# Altium PCB nrf24l01_mboard.PcbDoc
Units mm, origin at the board's own origin, x right, y up, seen from the top; angles counter-clockwise.
Board outline 110 x 50 mm, 2 copper layers (TopLayer, BottomLayer); 66 components, 67 nets, 257 pads, 0 vias.
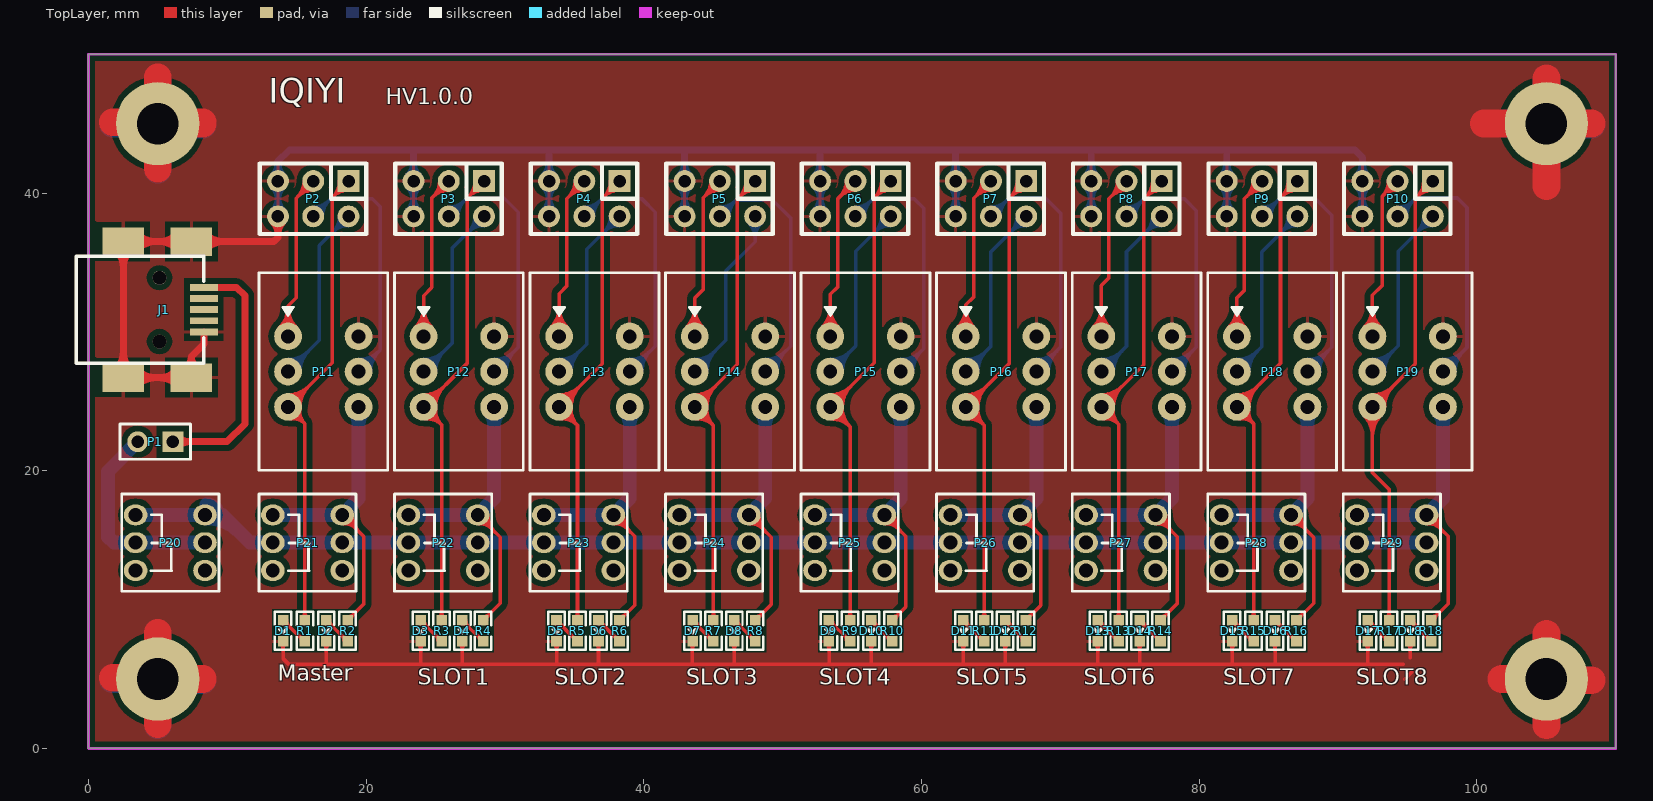
[diagram p0: TopLayer view]
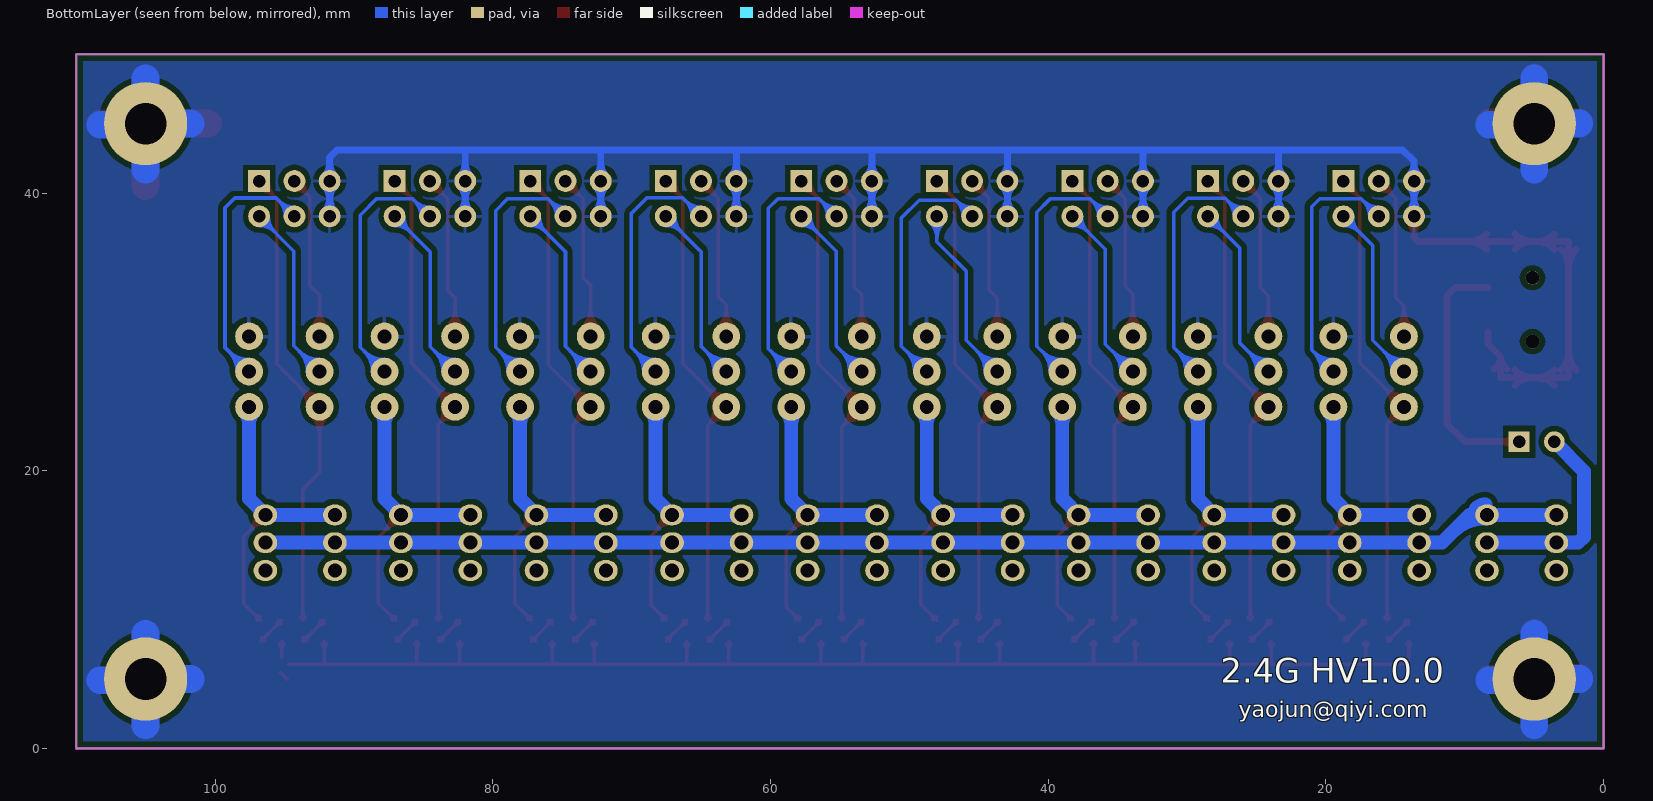
[diagram p1: BottomLayer view, seen from below]

## Layer stack, top to bottom
TopLayer: signal copper 0.0356
Dielectric: prepreg 0.32, FR-4, Dk 4.8
BottomLayer: signal copper 0.0356

## Board outline
0,0 110,0 110,50 0,50

## Design rules (kind name [scope] priority, off if disabled: settings)
Clearance Clearance_2 [All] p1 off: gap=0.4
Clearance Clearance_0 [All] p2: gap=0.203
ComponentClearance [All] p1: gap=0.1 collisioncheckmode=3 verticalgap=0.1 showdistances=FALSE
FabricationTestPointUsage TestPointUsage [All] p1: valid=0 allowmultiple=FALSE
FabricationTestpoint Testpoint [All] p1: side=3 testpointundercomponent=TRUE minsize=1.016 maxsize=2.54 preferedsize=1.524 minholesize=0.508 maxholesize=1.016 preferedholesize=0.813 testpointgrid=0.025 allowsidetop=TRUE allowsidebottom=TRUE usegrid=TRUE gridtolerance=0
PolygonConnect [All] p1: connectstyle=Relief reliefconductorwidth=0.254 reliefentries=4 polygonreliefangle="90 Angle"
RoutingVias [All] p1: holewidth=0.4 width=0.8 viastyle="Through Hole" minholewidth=0.2 minwidth=0.406 maxholewidth=0.711 maxwidth=1.27
SilkscreenOverComponentPads [All] p1: minsilkscreentomaskgap=0.254
SolderMaskExpansion [All] p1: expansion=0.102
Width [All] p1: maxlimit=5 minlimit=0.203 preferedwidth=0.203 minimp=50.000000 maximp=50.000000 favimp=50.000000
24 further rules are at their usual default settings.

## Components (designator, comment, footprint, x,y, rotation, side; value= is the part's Value field where it differs from the comment)
D1 "LED_G" LED-0603R 14.02,7.71 r90 top
D2 "LED_R" LED-0603R 17.13,7.71 r90 top
D3 "LED_G" LED-0603R 23.94,7.71 r90 top
D4 "LED_R" LED-0603R 26.933,7.71 r90 top
D5 "LED_G" LED-0603R 33.71,7.71 r90 top
D6 "LED_R" LED-0603R 36.737,7.71 r90 top
D7 "LED_G" LED-0603R 43.51,7.71 r90 top
D8 "LED_R" LED-0603R 46.517,7.71 r90 top
D9 "LED_G" LED-0603R 53.33,7.71 r90 top
D10 "LED_R" LED-0603R 56.377,7.71 r90 top
D11 "LED_G" LED-0603R 63.01,7.71 r90 top
D12 "LED_R" LED-0603R 66.017,7.71 r90 top
D13 "LED_G" LED-0603R 72.69,7.71 r90 top
D14 "LED_R" LED-0603R 75.703,7.71 r90 top
D15 "LED_G" LED-0603R 82.37,7.71 r90 top
D16 "LED_R" LED-0603R 85.457,7.71 r90 top
D17 "LED_G" LED-0603R 92.14,7.71 r90 top
D18 "LED_R" LED-0603R 95.193,7.71 r90 top
J1 "USB" USB-MINIB 8.32,33.2 r0 top
P1 "" HDR1X2 6.09,22.09 r180 top
P2 "Ex Port" IDC6 18.734,40.86 r180 top
P3 "Ex Port" IDC6 28.495,40.86 r180 top
P4 "Ex Port" IDC6 38.256,40.86 r180 top
P5 "Ex Port" IDC6 48.017,40.86 r180 top
P6 "Ex Port" IDC6 57.778,40.86 r180 top
P7 "Ex Port" IDC6 67.539,40.86 r180 top
P8 "Ex Port" IDC6 77.3,40.86 r180 top
P9 "Ex Port" IDC6 87.061,40.86 r180 top
P10 "Ex Port" IDC6 96.822,40.86 r180 top
P11 "Slot Master" "S-8M-2.54-5 6P" 14.382,29.68 r0 top
P12 "Slot 1" "S-8M-2.54-5 6P" 24.143,29.68 r0 top
P13 "Slot 2" "S-8M-2.54-5 6P" 33.904,29.68 r0 top
P14 "Slot 3" "S-8M-2.54-5 6P" 43.665,29.68 r0 top
P15 "Slot 4" "S-8M-2.54-5 6P" 53.426,29.68 r0 top
P16 "Slot 5" "S-8M-2.54-5 6P" 63.187,29.68 r0 top
P17 "Slot 6" "S-8M-2.54-5 6P" 72.948,29.68 r0 top
P18 "Slot 7" "S-8M-2.54-5 6P" 82.709,29.68 r0 top
P19 "Slot 8" "S-8M-2.54-5 6P" 92.47,29.68 r0 top
P20 "SW" SW-7X7 3.4,16.82 r0 top
P21 "SW" SW-7X7 13.282,16.82 r0 top
P22 "SW" SW-7X7 23.043,16.82 r0 top
P23 "SW" SW-7X7 32.804,16.82 r0 top
P24 "SW" SW-7X7 42.565,16.82 r0 top
P25 "SW" SW-7X7 52.326,16.82 r0 top
P26 "SW" SW-7X7 62.087,16.82 r0 top
P27 "SW" SW-7X7 71.848,16.82 r0 top
P28 "SW" SW-7X7 81.609,16.82 r0 top
P29 "SW" SW-7X7 91.37,16.82 r0 top
R1 "1K" 1608(0603R) 15.59,9.23 r270 top
R2 "1K" 1608(0603R) 18.67,9.23 r270 top
R3 "1K" 1608(0603R) 25.437,9.23 r270 top
R4 "1K" 1608(0603R) 28.43,9.23 r270 top
R5 "1K" 1608(0603R) 35.223,9.23 r270 top
R6 "1K" 1608(0603R) 38.25,9.23 r270 top
R7 "1K" 1608(0603R) 45.013,9.23 r270 top
R8 "1K" 1608(0603R) 48.02,9.23 r270 top
R9 "1K" 1608(0603R) 54.853,9.23 r270 top
R10 "1K" 1608(0603R) 57.9,9.23 r270 top
R11 "1K" 1608(0603R) 64.513,9.23 r270 top
R12 "1K" 1608(0603R) 67.52,9.23 r270 top
R13 "1K" 1608(0603R) 74.197,9.23 r270 top
R14 "1K" 1608(0603R) 77.21,9.23 r270 top
R15 "1K" 1608(0603R) 83.913,9.23 r270 top
R16 "1K" 1608(0603R) 87,9.23 r270 top
R17 "1K" 1608(0603R) 93.667,9.23 r270 top
R18 "1K" 1608(0603R) 96.72,9.23 r270 top

## Footprints (in the part's own frame and the unit in brackets; to place one, negate y for a bottom-side part, rotate by r counter-clockwise, add the part's x,y. Pads: shape width x height; smd on the part's side, far side on the other; paste and mask are expansions set on the pad)
1608(0603R) [mil]
  rect 30x30 smd: 1(0,0) 2(60,0)
  silkscreen extent -24,-23 84,23
HDR1X2 [mm] "Connector; Header; 2 Position"
  rect 1.5x1.5 hole 0.9: 1(0,0)
  round 1.5 hole 0.9: 2(2.54,0)
  silkscreen extent -1.27,-1.27 3.81,1.27
IDC6 [mil]
  rect 62x62 hole 35.43: 1(0,0)
  round 62 hole 35.43: 2(0,100) 3(100,0) 4(100,100) 5(200,0) 6(200,100)
  silkscreen extent -50,-50 252,150
LED-0603R [mil]
  rect 30x30 smd: A(60,0) K(0,0)
  silkscreen extent -24,-23 84,23
"S-8M-2.54-5 6P" [mm]
  round 2 hole 1: 1(0,0) 2(5.08,0) 3(0,-2.54) 4(5.08,-2.54) 5(0,-5.08) 6(5.08,-5.08)
  silkscreen extent -2.1,-9.65 7.18,4.57
SW-7X7 [mm]
  oval 1.7x1.5 hole 1: 1(0,0) 2(5,0) 3(0,-2) 4(5,-2) 5(0,-4) 6(5,-4)
  silkscreen extent -1,-5.5 6,1.5
USB-MINIB [mm]
  rect 2x0.5 smd: 1(0,0) 2(0,-0.8) 3(0,-1.6) 4(0,-3.2) 4b(0,-2.4)
  rect 3x2.05 smd: 4(-5.8,-6.5) 4(-5.8,3.3) 4(-0.9,-6.5) 4(-0.9,3.3)
  round 1 hole 1 unplated: ""(-3.2,-3.9) ""(-3.2,0.7)
  silkscreen extent -9.2,-5.45 0,2.25

## Part data
D1 D2 D3 D4 D5 D6 D7 D8 D9 D10 D11 D12 D13 D14 D15 D16 D17 D18: library part LED
J1: library part CON4, "Connector"
P1: library part "Header 2", "Header, 2-Pin"
P2 P3 P4 P5 P6 P7 P8 P9 P10 P11 P12 P13 P14 P15 P16 P17 P18 P19 P20 P21 P22 P23 P24 P25 P26 P27 P28 P29: library part "Header 3X2", "Header, 3-Pin, Dual row"
R1 R2 R3 R4 R5 R6 R7 R8 R9 R10 R11 R12 R13 R14 R15 R16 R17 R18: library part Res2, "Resistor"

## Free pads (board coordinates)
  round 6 hole 3: 0(5,5) 0(5,45) 0(105,5) 0(105,45)

## Nets (pads, with @x,y where several pads share a name; then routed paths per layer and width w, separated by ;. In a path a pad name is that pad's centre, name@x,y a point inside that pad or via, vN(x,y) a via of type N, cw(c..) or ccw(c..) an arc to the next point about the centre after c; other vN are vias at no path point)
DGND: D1.K D2.K D3.K D4.K D5.K D6.K D7.K D8.K D9.K D10.K D11.K D12.K D13.K D14.K D15.K D16.K D17.K D18.K J1.4 P2.5 P2.6 P3.5 P3.6 P4.5 P4.6 P5.5 P5.6 P6.5 P6.6 P7.5 P7.6 P8.5 P8.6 P9.5 P9.6 P10.5 P10.6 P11.2 P12.2 P13.2 P14.2 P15.2 P16.2 P17.2 P18.2 P19.2 pad.0 | length 467.1
  TopLayer w0.254: D1.K@13.84,7.53 cw(c13.407,7.097) 14.02,7.097 cw(c14.633,7.097) D1.K@14.2,7.53 ; D1.K 14.02,6.48 14.45,6.05 94.7,6.05 ; D2.K@16.95,7.53 cw(c16.517,7.097) 17.13,7.097 cw(c17.743,7.097) D2.K@17.31,7.53 ; 17.13,6.16 D2.K ; D3.K@23.76,7.53 cw(c23.375,7.145) 23.92,7.145 ; 23.92,6.09 D3.K@23.92,7.71 ; 23.92,7.048 cw(c24.602,7.048) D3.K@24.12,7.53 ; D4.K@26.754,7.53 cw(c26.32,7.097) 26.933,7.097 cw(c27.547,7.097) D4.K@27.113,7.53 ; 26.933,6.09 D4.K ; D5.K@33.53,7.53 cw(c33.065,7.065) 33.723,7.065 ; 33.723,6.09 D5.K@33.723,7.71 ; 33.723,7.129 cw(c34.291,7.129) D5.K@33.89,7.53 ; D6.K@36.557,7.53 cw(c36.123,7.097) 36.737,7.097 cw(c37.35,7.097) D6.K@36.916,7.53 ; 36.737,6.09 D6.K ; D7.K@43.33,7.53 cw(c42.913,7.113) 43.503,7.113 ; 43.503,6.09 D7.K@43.503,7.71 ; 43.503,7.081 cw(c44.139,7.081) D7.K@43.69,7.53 ; D8.K@46.337,7.53 cw(c45.903,7.097) 46.517,7.097 cw(c47.13,7.097) D8.K@46.696,7.53 ; 46.517,6.09 D8.K ; D9.K@53.15,7.53 cw(c52.636,7.016) 53.363,7.016 ; 53.363,6.09 D9.K@53.363,7.71 ; 53.363,7.177 cw(c53.863,7.177) D9.K@53.51,7.53 ; D10.K@56.197,7.53 cw(c55.763,7.097) 56.377,7.097 cw(c56.99,7.097) D10.K@56.556,7.53 ; 56.377,6.09 D10.K ; D11.K@62.83,7.53 cw(c62.413,7.113) 63.003,7.113 ; 63.003,6.09 D11.K@63.003,7.71 ; 63.003,7.081 cw(c63.639,7.081) D11.K@63.19,7.53 ; D12.K@65.837,7.53 cw(c65.403,7.097) 66.017,7.097 cw(c66.63,7.097) D12.K@66.196,7.53 ; 66.017,6.09 D12.K ; D13.K@72.51,7.53 cw(c72.077,7.097) 72.69,7.097 cw(c73.303,7.097) D13.K@72.87,7.53 ; 72.69,6.09 D13.K ; D14.K@75.524,7.53 cw(c75.09,7.097) 75.703,7.097 cw(c76.317,7.097) D14.K@75.883,7.53 ; 75.703,6.09 D14.K ; D15.K@82.19,7.53 cw(c81.757,7.097) 82.37,7.097 cw(c82.983,7.097) D15.K@82.55,7.53 ; 82.37,6.09 D15.K ; D16.K@85.277,7.53 cw(c84.843,7.097) 85.457,7.097 cw(c86.07,7.097) D16.K@85.636,7.53 ; 85.457,6.09 D16.K ; D17.K@91.96,7.53 cw(c91.527,7.097) 92.14,7.097 cw(c92.753,7.097) D17.K@92.32,7.53 ; 92.14,6.09 D17.K ; 94.79,4.99 95.283,5.483 ; D18.K@95.014,7.53 cw(c94.58,7.097) 95.193,7.097 cw(c95.807,7.097) D18.K@95.373,7.53 ; 95.193,6.543 D18.K
  TopLayer w0.5: J1.4@1.972,27.248 ccw(c0.649,28.571) 2.52,28.571 ccw(c4.391,28.571) J1.4@3.068,27.248 ; J1.4@1.972,35.952 cw(c0.649,34.629) 2.52,34.629 cw(c4.391,34.629) J1.4@3.068,35.952 ; J1.4@3.543,26.152 cw(c4.866,24.829) 4.866,26.7 cw(c4.866,28.571) J1.4@3.543,27.248 ; J1.4@3.543,35.952 cw(c4.866,34.629) 4.866,36.5 cw(c4.866,38.371) J1.4@3.543,37.048 ; J1.4@6.397,26.152 ccw(c5.074,24.829) 5.074,26.7 ccw(c5.074,28.571) J1.4@6.397,27.248 ; J1.4@6.397,35.952 ccw(c5.074,34.629) 5.074,36.5 ccw(c5.074,38.371) J1.4@6.397,37.048 ; J1.4@6.958,27.322 ccw(c6.278,28.24) 7.42,28.24 ; J1.4@7.882,27.322 cw(c8.562,28.24) 7.42,28.24 ; J1.4@8.32,30 8.32,29.14 7.42,28.24 ; J1.4@8.443,35.952 cw(c9.766,34.629) 9.766,36.5 cw(c9.766,38.371) J1.4@8.443,37.048 ; P2.6@13.274,37.94 cw(c12.357,37.023) 13.654,37.023 cw(c14.952,37.023) P2.6@14.034,37.94 ; P2.6 13.654,36.804 13.35,36.5 7.42,36.5 2.52,36.5 2.52,26.7 7.42,26.7 7.42,28.24
  TopLayer w2: 1.76,5.09 5,5.09 5,8.33 ; 1.76,45.09 pad.0@5,45.09 ; 5,1.76 5,5 8.24,5 ; 5,41.76 5,45 8.24,45 ; 5,48.33 pad.0@5,45.09 ; 8.24,45.09 pad.0@5,45.09 ; 100.5,45 pad.0@105,45 ; 101.76,5 105,5 105,8.24 ; 105,1.67 105,4.91 108.24,4.91 ; 105,40.5 pad.0@105,45 ; 105,48.24 pad.0@105,45 ; 108.24,45 pad.0@105,45
  BottomLayer w0.5: P2.6@13.274,38.7 ccw(c12.357,39.617) 13.654,39.617 ccw(c14.952,39.617) P2.6@14.034,38.7 ; P2.5@13.274,40.48 cw(c12.357,39.563) 13.654,39.563 cw(c14.952,39.563) P2.5@14.034,40.48 ; P2.5@13.274,41.24 ccw(c12.357,42.157) 13.654,42.157 ccw(c14.952,42.157) P2.5@14.034,41.24 ; P2.6 P2.5 13.654,42.294 14.47,43.11 91.2,43.11 91.742,42.568 P10.5 P10.6 ; P3.6@23.035,38.7 ccw(c22.118,39.617) 23.415,39.617 ccw(c24.713,39.617) P3.6@23.795,38.7 ; P3.5@23.035,40.48 cw(c22.118,39.563) 23.415,39.563 cw(c24.713,39.563) P3.5@23.795,40.48 ; P3.5@23.035,41.24 ccw(c22.118,42.157) 23.415,42.157 ccw(c24.713,42.157) P3.5@23.795,41.24 ; P3.6 P3.5 23.415,43.055 ; P4.6@32.796,38.7 ccw(c31.879,39.617) 33.176,39.617 ccw(c34.474,39.617) P4.6@33.556,38.7 ; P4.5@32.796,40.48 cw(c31.879,39.563) 33.176,39.563 cw(c34.474,39.563) P4.5@33.556,40.48 ; P4.5@32.796,41.24 ccw(c31.879,42.157) 33.176,42.157 ccw(c34.474,42.157) P4.5@33.556,41.24 ; P4.6 P4.5 33.176,42.934 ; P5.6@42.557,38.7 ccw(c41.64,39.617) 42.937,39.617 ccw(c44.235,39.617) P5.6@43.317,38.7 ; P5.5@42.557,40.48 cw(c41.64,39.563) 42.937,39.563 cw(c44.235,39.563) P5.5@43.317,40.48 ; P5.5@42.557,41.24 ccw(c41.64,42.157) 42.937,42.157 ccw(c44.235,42.157) P5.5@43.317,41.24 ; P5.6 P5.5 42.937,42.957 ; P6.6@52.318,38.7 ccw(c51.401,39.617) 52.698,39.617 ccw(c53.996,39.617) P6.6@53.078,38.7 ; P6.5@52.318,40.48 cw(c51.401,39.563) 52.698,39.563 cw(c53.996,39.563) P6.5@53.078,40.48 ; P6.5@52.318,41.24 ccw(c51.401,42.157) 52.698,42.157 ccw(c53.996,42.157) P6.5@53.078,41.24 ; P6.6 P6.5 52.698,42.982 ; P7.6@62.079,38.7 ccw(c61.162,39.617) 62.459,39.617 ccw(c63.757,39.617) P7.6@62.839,38.7 ; P7.5@62.079,40.48 cw(c61.162,39.563) 62.459,39.563 cw(c63.757,39.563) P7.5@62.839,40.48 ; P7.5@62.079,41.24 ccw(c61.162,42.157) 62.459,42.157 ccw(c63.757,42.157) P7.5@62.839,41.24 ; P7.6 P7.5 62.459,42.999 ; P8.6@71.84,38.7 ccw(c70.923,39.617) 72.22,39.617 ccw(c73.518,39.617) P8.6@72.6,38.7 ; P8.5@71.84,40.48 cw(c70.923,39.563) 72.22,39.563 cw(c73.518,39.563) P8.5@72.6,40.48 ; P8.5@71.84,41.24 ccw(c70.923,42.157) 72.22,42.157 ccw(c73.518,42.157) P8.5@72.6,41.24 ; P8.6 P8.5 72.22,42.98 ; P9.6@81.601,38.7 ccw(c80.684,39.617) 81.981,39.617 ccw(c83.279,39.617) P9.6@82.361,38.7 ; P9.5@81.601,40.48 cw(c80.684,39.563) 81.981,39.563 cw(c83.279,39.563) P9.5@82.361,40.48 ; P9.5@81.601,41.24 ccw(c80.684,42.157) 81.981,42.157 ccw(c83.279,42.157) P9.5@82.361,41.24 ; P9.6 P9.5 81.981,43.071 ; P10.6@91.362,38.7 ccw(c90.445,39.617) 91.742,39.617 ccw(c93.04,39.617) P10.6@92.122,38.7 ; P10.5@91.362,40.48 cw(c90.445,39.563) 91.742,39.563 cw(c93.04,39.563) P10.5@92.122,40.48 ; P10.5@91.362,41.24 ccw(c90.445,42.157) 91.742,42.157 ccw(c93.04,42.157) P10.5@92.122,41.24
  BottomLayer w2: 1.76,5 5,5 5,8.24 ; 1.76,45 5,45 5,48.24 ; 5,1.67 5,4.91 8.24,4.91 ; 5,41.67 5,44.91 8.24,44.91 ; 101.76,5 105,5 105,8.24 ; 101.76,45 105,45 105,48.24 ; 105,1.67 105,4.91 108.24,4.91 ; 105,41.67 105,44.91 108.24,44.91
DVDD5.0: P20.1 P20.2 P21.3 P21.4 P22.3 P22.4 P23.3 P23.4 P24.3 P24.4 P25.3 P25.4 P26.3 P26.4 P27.3 P27.4 P28.3 P28.4 P29.3 P29.4 | length 99
  BottomLayer w1: P20.1 P20.2 9.65,16.82 11.65,14.82 P21.3 P21.4 P22.3 P22.4 P23.3 P23.4 P24.3 P24.4 P25.3 P25.4 P26.3 P26.4 P27.3 P27.4 P28.3 P28.4 P29.3 P29.4 ; P20.2@8.5,16.57 cw(c8.5,13.19) 10.89,15.58 ; 8.5,17.57 cw(c8.5,16.604) 9.183,17.287 ; P20.2@8.591,16.587 cw(c9.146,15.166) 10.225,16.245
NetD1_A: D1.A R1.2 | length 4.1
  TopLayer w0.254: D1.A@14.02,8.98 cw(c14.02,8.367) 14.454,8.8 cw(c14.887,9.234) D1.A@14.274,9.234 ; D1.A 15.548,7.706 R1.2 ; 15.085,8.169 ccw(c15.59,8.675) R1.2@15.59,7.96 ; 15.186,8.068 cw(c14.824,7.706) R1.2@15.336,7.706
NetD2_A: D2.A R2.2 | length 4.1
  TopLayer w0.254: D2.A@17.13,8.98 cw(c17.13,8.338) 17.584,8.792 ; D2.A 17.142,9.234 R2.2 ; D2.A@17.384,9.234 ccw(c17.968,9.234) 17.555,8.821 ; R2.2@18.416,7.706 ccw(c17.803,7.706) 18.236,8.14 ccw(c18.67,8.573) R2.2@18.67,7.96
NetD3_A: D3.A R3.2 | length 4.1
  TopLayer w0.254: D3.A@23.94,8.98 cw(c23.94,8.442) 24.32,8.823 ; D3.A 23.94,9.203 R3.2 ; D3.A@24.194,9.234 ccw(c24.883,9.234) 24.396,8.747 ; R3.2@25.183,7.706 ccw(c24.569,7.706) 25.003,8.14 ccw(c25.437,8.573) R3.2@25.437,7.96
NetD4_A: D4.A R4.2 | length 4.1
  TopLayer w0.254: D4.A@26.933,8.98 cw(c26.933,8.442) 27.313,8.823 ; D4.A 26.933,9.203 R4.2 ; D4.A@27.187,9.234 ccw(c27.876,9.234) 27.389,8.747 ; R4.2@28.176,7.706 ccw(c27.563,7.706) 27.996,8.14 ccw(c28.43,8.573) R4.2@28.43,7.96
NetD5_A: D5.A R5.2 | length 4.1
  TopLayer w0.254: D5.A@33.71,8.98 cw(c33.71,8.402) 34.119,8.811 ; D5.A 33.71,9.219 R5.2 ; D5.A@33.964,9.234 ccw(c34.613,9.234) 34.154,8.775 ; R5.2@34.969,7.706 ccw(c34.356,7.706) 34.79,8.14 ccw(c35.223,8.573) R5.2@35.223,7.96
NetD6_A: D6.A R6.2 | length 4.1
  TopLayer w0.254: D6.A@36.737,8.98 cw(c36.737,8.402) 37.145,8.811 ; D6.A 36.737,9.219 R6.2 ; D6.A@36.991,9.234 ccw(c37.639,9.234) 37.181,8.775 ; R6.2@37.996,7.706 ccw(c37.383,7.706) 37.816,8.14 ccw(c38.25,8.573) R6.2@38.25,7.96
NetD7_A: D7.A R7.2 | length 4.1
  TopLayer w0.254: D7.A@43.51,8.98 cw(c43.51,8.426) 43.901,8.818 ; D7.A 43.51,9.209 R7.2 ; D7.A@43.764,9.234 ccw(c44.437,9.234) 43.961,8.758 ; R7.2@44.759,7.706 ccw(c44.146,7.706) 44.58,8.14 ccw(c45.013,8.573) R7.2@45.013,7.96
NetD8_A: D8.A R8.2 | length 4.1
  TopLayer w0.254: D8.A@46.517,8.98 cw(c46.517,8.367) 46.95,8.8 cw(c47.384,9.234) D8.A@46.771,9.234 ; D8.A 48.02,7.731 R8.2 ; 47.569,8.182 cw(c47.093,7.706) R8.2@47.766,7.706 ; 47.628,8.122 ccw(c48.02,8.514) R8.2@48.02,7.96
NetD9_A: D9.A R9.2 | length 4.1
  TopLayer w0.254: D9.A@53.33,8.98 cw(c53.33,8.367) 53.764,8.8 cw(c54.197,9.234) D9.A@53.584,9.234 ; D9.A 54.853,7.711 R9.2 ; 54.416,8.148 cw(c53.975,7.706) R9.2@54.599,7.706 ; 54.428,8.136 ccw(c54.853,8.562) R9.2@54.853,7.96
NetD10_A: D10.A R10.2 | length 4.1
  TopLayer w0.254: D10.A@56.377,8.98 cw(c56.377,8.367) 56.81,8.8 cw(c57.244,9.234) D10.A@56.631,9.234 ; D10.A 57.9,7.711 R10.2 ; 57.463,8.148 cw(c57.022,7.706) R10.2@57.646,7.706 ; 57.474,8.136 ccw(c57.9,8.562) R10.2@57.9,7.96
NetD11_A: D11.A R11.2 | length 4.1
  TopLayer w0.254: D11.A@63.01,8.98 cw(c63.01,8.426) 63.401,8.818 ; D11.A 63.01,9.209 R11.2 ; D11.A@63.264,9.234 ccw(c63.937,9.234) 63.461,8.758 ; R11.2@64.259,7.706 ccw(c63.646,7.706) 64.08,8.14 ccw(c64.513,8.573) R11.2@64.513,7.96
NetD12_A: D12.A R12.2 | length 4.1
  TopLayer w0.254: D12.A@66.017,8.98 cw(c66.017,8.351) 66.462,8.796 ; D12.A@66.023,9.234 67.52,7.737 R12.2 ; D12.A@66.271,9.234 ccw(c66.868,9.234) 66.446,8.812 ; 67.064,8.193 cw(c66.577,7.706) R12.2@67.266,7.706 ; 67.14,8.117 ccw(c67.52,8.498) R12.2@67.52,7.96
NetD13_A: D13.A R13.2 | length 4.1
  TopLayer w0.254: D13.A@72.69,8.98 cw(c72.69,8.418) 73.087,8.815 ; D13.A 72.69,9.213 R13.2 ; D13.A@72.944,9.234 ccw(c73.609,9.234) 73.139,8.764 ; R13.2@73.943,7.706 ccw(c73.329,7.706) 73.763,8.14 ccw(c74.197,8.573) R13.2@74.197,7.96
NetD14_A: D14.A R14.2 | length 4.1
  TopLayer w0.254: D14.A@75.703,8.98 cw(c75.703,8.367) 76.137,8.8 cw(c76.571,9.234) D14.A@75.957,9.234 ; D14.A 77.21,7.727 R14.2 ; 76.761,8.176 cw(c76.291,7.706) R14.2@76.956,7.706 ; 76.813,8.125 ccw(c77.21,8.522) R14.2@77.21,7.96
NetD15_A: D15.A R15.2 | length 4.1
  TopLayer w0.254: D15.A@82.37,8.98 cw(c82.37,8.367) 82.804,8.8 cw(c83.237,9.234) D15.A@82.624,9.234 ; D15.A 83.898,7.706 R15.2 ; 83.454,8.15 ccw(c83.913,8.61) R15.2@83.913,7.96 ; 83.491,8.113 cw(c83.083,7.706) R15.2@83.659,7.706
NetD16_A: D16.A R16.2 | length 4.1
  TopLayer w0.254: D16.A@85.457,8.98 cw(c85.457,8.367) 85.89,8.8 cw(c86.324,9.234) D16.A@85.711,9.234 ; D16.A 86.985,7.706 R16.2 ; 86.54,8.15 ccw(c87,8.61) R16.2@87,7.96 ; 86.577,8.113 cw(c86.17,7.706) R16.2@86.746,7.706
NetD17_A: D17.A R17.2 | length 4.1
  TopLayer w0.254: D17.A@92.14,8.98 cw(c92.14,8.37) 92.571,8.801 ; D17.A D17.A R17.2 ; D17.A@92.394,9.234 ccw(c93.01,9.234) 92.575,8.798 ; R17.2@93.413,7.706 ccw(c92.799,7.706) 93.233,8.14 ccw(c93.667,8.573) R17.2@93.667,7.96
NetD18_A: D18.A R18.2 | length 4.1
  TopLayer w0.254: D18.A@95.193,8.98 cw(c95.193,8.37) 95.625,8.801 ; D18.A D18.A R18.2 ; D18.A@95.447,9.234 ccw(c96.064,9.234) 95.628,8.798 ; R18.2@96.466,7.706 ccw(c95.853,7.706) 96.286,8.14 ccw(c96.72,8.573) R18.2@96.72,7.96
NetJ1_1: J1.1 P1.1 | length 20
  TopLayer w0.5: P1.1 9.99,22.09 11.27,23.37 11.27,32.61 10.68,33.2 J1.1 ; P1.1@6.444,21.736 cw(c7.297,20.883) 7.297,22.09 cw(c7.297,23.297) P1.1@6.444,22.444
NetP2_2: P2.2 P11.3 | length 22.7
  BottomLayer w0.254: P11.3 16.63,29.388 16.63,32.19 16.63,36.216 P2.2 ; P11.3@14.382,27.759 ccw(c14.382,29.253) 15.439,28.197 ccw(c16.495,27.14) P11.3@15.001,27.14 ; P11.3@14.382,28.013 ccw(c14.382,30.121) 15.872,28.63 ccw(c17.363,27.14) P11.3@15.255,27.14 ; P2.2@18.074,38.32 cw(c16.48,38.32) 17.607,37.193 cw(c18.734,36.065) P2.2@18.734,37.66 ; P2.2@18.328,38.32 cw(c17.347,38.32) 18.041,37.626 cw(c18.734,36.932) P2.2@18.734,37.914
NetP2_3: P2.3 P11.1 | length 21.6
  TopLayer w0.254: P11.1@13.765,30.297 ccw(c12.274,31.788) 14.382,31.788 ccw(c16.49,31.788) P11.1@14.999,30.297 ; P11.1@13.944,30.118 ccw(c12.888,31.174) 14.382,31.174 ccw(c15.876,31.174) P11.1@14.82,30.118 ; P11.1 14.382,31.872 14.97,32.46 14.97,39.636 P2.3 ; P2.3@15.534,40.86 cw(c13.94,40.86) 15.067,39.733 cw(c16.194,38.605) P2.3@16.194,40.2 ; P2.3@15.788,40.86 cw(c14.807,40.86) 15.501,40.166 cw(c16.194,39.472) P2.3@16.194,40.454
NetP2_4: P2.4 P11.4 | length 27.8
  BottomLayer w0.254: P2.4 17.464,39.59 20.44,39.59 21.02,39.01 21.02,28.698 P11.4 ; P2.4@16.194,38.726 ccw(c16.194,39.708) 16.888,39.014 ccw(c17.582,38.32) P2.4@16.601,38.32 ; P2.4@16.194,38.98 ccw(c16.194,40.575) 17.322,39.447 ccw(c18.449,38.32) P2.4@16.855,38.32 ; P11.4@19.462,27.759 ccw(c19.462,29.253) 20.519,28.197 ccw(c21.575,27.14) P11.4@20.081,27.14 ; P11.4@19.462,28.013 ccw(c19.462,30.121) 20.952,28.63 ccw(c22.443,27.14) P11.4@20.335,27.14
NetP3_2: P3.2 P12.3 | length 22.7
  BottomLayer w0.254: P12.3 26.19,29.187 26.19,33.21 26.19,36.015 P3.2 ; P12.3@24.143,27.759 ccw(c24.143,29.253) 25.2,28.197 ccw(c26.256,27.14) P12.3@24.762,27.14 ; P12.3@24.143,28.013 ccw(c24.143,30.121) 25.633,28.63 ccw(c27.124,27.14) P12.3@25.016,27.14 ; P3.2@27.835,38.32 cw(c26.241,38.32) 27.368,37.193 cw(c28.495,36.065) P3.2@28.495,37.66 ; P3.2@28.089,38.32 cw(c27.108,38.32) 27.802,37.626 cw(c28.495,36.932) P3.2@28.495,37.914
NetP3_3: P3.3 P12.1 | length 21.6
  TopLayer w0.254: P12.1@23.526,30.297 ccw(c22.035,31.788) 24.143,31.788 ccw(c26.251,31.788) P12.1@24.76,30.297 ; P12.1@23.705,30.118 ccw(c22.649,31.174) 24.143,31.174 ccw(c25.637,31.174) P12.1@24.581,30.118 ; P12.1 24.143,32.603 24.74,33.2 24.74,39.645 P3.3 ; P3.3@25.295,40.86 cw(c23.701,40.86) 24.828,39.733 cw(c25.955,38.605) P3.3@25.955,40.2 ; P3.3@25.549,40.86 cw(c24.568,40.86) 25.262,40.166 cw(c25.955,39.472) P3.3@25.955,40.454
NetP3_4: P3.4 P12.4 | length 27.9
  BottomLayer w0.254: P3.4 27.255,39.62 29.96,39.62 30.96,38.62 30.96,28.877 P12.4 ; P3.4@25.955,38.726 ccw(c25.955,39.708) 26.649,39.014 ccw(c27.343,38.32) P3.4@26.362,38.32 ; P3.4@25.955,38.98 ccw(c25.955,40.575) 27.083,39.447 ccw(c28.21,38.32) P3.4@26.616,38.32 ; P12.4@29.223,27.759 ccw(c29.223,29.253) 30.28,28.197 ccw(c31.336,27.14) P12.4@29.842,27.14 ; P12.4@29.223,28.013 ccw(c29.223,30.121) 30.713,28.63 ccw(c32.204,27.14) P12.4@30.096,27.14
NetP4_2: P4.2 P13.3 | length 22.7
  BottomLayer w0.254: P13.3 35.88,29.116 35.88,32.83 35.88,35.944 P4.2 ; P13.3@33.904,27.759 ccw(c33.904,29.253) 34.961,28.197 ccw(c36.017,27.14) P13.3@34.523,27.14 ; P13.3@33.904,28.013 ccw(c33.904,30.121) 35.394,28.63 ccw(c36.885,27.14) P13.3@34.777,27.14 ; P4.2@37.596,38.32 cw(c36.002,38.32) 37.129,37.193 cw(c38.256,36.065) P4.2@38.256,37.66 ; P4.2@37.85,38.32 cw(c36.869,38.32) 37.563,37.626 cw(c38.256,36.932) P4.2@38.256,37.914
NetP4_3: P4.3 P13.1 | length 21.6
  TopLayer w0.254: P13.1@33.287,30.297 ccw(c31.796,31.788) 33.904,31.788 ccw(c36.012,31.788) P13.1@34.521,30.297 ; P13.1@33.466,30.118 ccw(c32.41,31.174) 33.904,31.174 ccw(c35.398,31.174) P13.1@34.342,30.118 ; P13.1 33.904,32.754 34.45,33.3 34.45,39.594 P4.3 ; P4.3@35.056,40.86 cw(c33.462,40.86) 34.589,39.733 cw(c35.716,38.605) P4.3@35.716,40.2 ; P4.3@35.31,40.86 cw(c34.329,40.86) 35.023,40.166 cw(c35.716,39.472) P4.3@35.716,40.454
NetP4_4: P4.4 P13.4 | length 28
  BottomLayer w0.254: P4.4 36.966,39.57 39.87,39.57 40.82,38.62 40.82,28.976 P13.4 ; P4.4@35.716,38.726 ccw(c35.716,39.708) 36.41,39.014 ccw(c37.104,38.32) P4.4@36.123,38.32 ; P4.4@35.716,38.98 ccw(c35.716,40.575) 36.844,39.447 ccw(c37.971,38.32) P4.4@36.377,38.32 ; P13.4@38.984,27.759 ccw(c38.984,29.253) 40.041,28.197 ccw(c41.097,27.14) P13.4@39.603,27.14 ; P13.4@38.984,28.013 ccw(c38.984,30.121) 40.474,28.63 ccw(c41.965,27.14) P13.4@39.857,27.14
NetP5_2: P5.2 P14.3 | length 22.7
  BottomLayer w0.254: P14.3 45.91,29.385 45.91,34.38 48.017,36.487 P5.2 ; P14.3@43.665,27.759 ccw(c43.665,29.253) 44.722,28.197 ccw(c45.778,27.14) P14.3@44.284,27.14 ; P14.3@43.665,28.013 ccw(c43.665,30.121) 45.155,28.63 ccw(c46.646,27.14) P14.3@44.538,27.14 ; P5.2@47.55,37.853 cw(c46.423,36.726) 48.017,36.726 cw(c49.612,36.726) P5.2@48.484,37.853 ; P5.2@47.73,38.033 cw(c47.036,37.339) 48.017,37.339 cw(c48.998,37.339) P5.2@48.305,38.033
NetP5_3: P5.3 P14.1 | length 21.6
  TopLayer w0.254: P14.1@43.048,30.297 ccw(c41.557,31.788) 43.665,31.788 ccw(c45.773,31.788) P14.1@44.282,30.297 ; P14.1@43.227,30.118 ccw(c42.171,31.174) 43.665,31.174 ccw(c45.159,31.174) P14.1@44.103,30.118 ; P14.1 43.665,32.435 44.28,33.05 44.28,39.663 P5.3 ; P5.3@44.817,40.86 cw(c43.223,40.86) 44.35,39.733 cw(c45.477,38.605) P5.3@45.477,40.2 ; P5.3@45.071,40.86 cw(c44.09,40.86) 44.784,40.166 cw(c45.477,39.472) P5.3@45.477,40.454
NetP5_4: P5.4 P14.4 | length 27.6
  BottomLayer w0.254: P5.4 46.637,39.48 49.29,39.48 50.57,38.2 50.57,28.965 P14.4 ; P5.4@45.477,38.726 ccw(c45.477,39.708) 46.171,39.014 ccw(c46.865,38.32) P5.4@45.884,38.32 ; P5.4@45.477,38.98 ccw(c45.477,40.575) 46.605,39.447 ccw(c47.732,38.32) P5.4@46.138,38.32 ; P14.4@48.745,27.759 ccw(c48.745,29.253) 49.802,28.197 ccw(c50.858,27.14) P14.4@49.364,27.14 ; P14.4@48.745,28.013 ccw(c48.745,30.121) 50.235,28.63 ccw(c51.726,27.14) P14.4@49.618,27.14
NetP6_2: P6.2 P15.3 | length 22.7
  BottomLayer w0.254: P15.3 55.27,28.984 55.27,32.12 55.27,35.812 P6.2 ; P15.3@53.426,27.759 ccw(c53.426,29.253) 54.483,28.197 ccw(c55.539,27.14) P15.3@54.045,27.14 ; P15.3@53.426,28.013 ccw(c53.426,30.121) 54.916,28.63 ccw(c56.407,27.14) P15.3@54.299,27.14 ; P6.2@57.118,38.32 cw(c55.524,38.32) 56.651,37.193 cw(c57.778,36.065) P6.2@57.778,37.66 ; P6.2@57.372,38.32 cw(c56.391,38.32) 57.085,37.626 cw(c57.778,36.932) P6.2@57.778,37.914
NetP6_3: P6.3 P15.1 | length 21.6
  TopLayer w0.254: P15.1@52.809,30.297 ccw(c51.318,31.788) 53.426,31.788 ccw(c55.534,31.788) P15.1@54.043,30.297 ; P15.1@52.988,30.118 ccw(c51.932,31.174) 53.426,31.174 ccw(c54.92,31.174) P15.1@53.864,30.118 ; P15.1 53.426,32.706 53.98,33.26 53.98,39.602 P6.3 ; P6.3@54.578,40.86 cw(c52.984,40.86) 54.111,39.733 cw(c55.238,38.605) P6.3@55.238,40.2 ; P6.3@54.832,40.86 cw(c53.851,40.86) 54.545,40.166 cw(c55.238,39.472) P6.3@55.238,40.454
NetP6_4: P6.4 P15.4 | length 27.9
  BottomLayer w0.254: P6.4 56.488,39.57 59.48,39.57 60.15,38.9 60.15,28.784 P15.4 ; P6.4@55.238,38.726 ccw(c55.238,39.708) 55.932,39.014 ccw(c56.626,38.32) P6.4@55.645,38.32 ; P6.4@55.238,38.98 ccw(c55.238,40.575) 56.366,39.447 ccw(c57.493,38.32) P6.4@55.899,38.32 ; P15.4@58.506,27.759 ccw(c58.506,29.253) 59.563,28.197 ccw(c60.619,27.14) P15.4@59.125,27.14 ; P15.4@58.506,28.013 ccw(c58.506,30.121) 59.996,28.63 ccw(c61.487,27.14) P15.4@59.379,27.14
NetP7_2: P7.2 P16.3 | length 22.7
  BottomLayer w0.254: P16.3 65,28.953 65,35.781 P7.2 ; P16.3@63.187,27.759 ccw(c63.187,29.253) 64.244,28.197 ccw(c65.3,27.14) P16.3@63.806,27.14 ; P16.3@63.187,28.013 ccw(c63.187,30.121) 64.677,28.63 ccw(c66.168,27.14) P16.3@64.06,27.14 ; P7.2@66.879,38.32 cw(c65.285,38.32) 66.412,37.193 cw(c67.539,36.065) P7.2@67.539,37.66 ; P7.2@67.133,38.32 cw(c66.152,38.32) 66.846,37.626 cw(c67.539,36.932) P7.2@67.539,37.914
NetP7_3: P7.3 P16.1 | length 21.6
  TopLayer w0.254: P16.1@62.57,30.297 ccw(c61.079,31.788) 63.187,31.788 ccw(c65.295,31.788) P16.1@63.804,30.297 ; P16.1@62.749,30.118 ccw(c61.693,31.174) 63.187,31.174 ccw(c64.681,31.174) P16.1@63.625,30.118 ; P16.1 63.187,31.947 63.75,32.51 63.75,39.611 P7.3 ; P7.3@64.339,40.86 cw(c62.745,40.86) 63.872,39.733 cw(c64.999,38.605) P7.3@64.999,40.2 ; P7.3@64.593,40.86 cw(c63.612,40.86) 64.306,40.166 cw(c64.999,39.472) P7.3@64.999,40.454
NetP7_4: P7.4 P16.4 | length 27.8
  BottomLayer w0.254: P7.4 66.329,39.65 68.89,39.65 70.01,38.53 70.01,28.883 P16.4 ; P7.4@64.999,38.726 ccw(c64.999,39.708) 65.693,39.014 ccw(c66.387,38.32) P7.4@65.406,38.32 ; P7.4@64.999,38.98 ccw(c64.999,40.575) 66.127,39.447 ccw(c67.254,38.32) P7.4@65.66,38.32 ; P16.4@68.267,27.759 ccw(c68.267,29.253) 69.324,28.197 ccw(c70.38,27.14) P16.4@68.886,27.14 ; P16.4@68.267,28.013 ccw(c68.267,30.121) 69.757,28.63 ccw(c71.248,27.14) P16.4@69.14,27.14
NetP8_2: P8.2 P17.3 | length 22.7
  BottomLayer w0.254: P17.3 74.76,28.952 74.76,35.78 P8.2 ; P17.3@72.948,27.759 ccw(c72.948,29.253) 74.005,28.197 ccw(c75.061,27.14) P17.3@73.567,27.14 ; P17.3@72.948,28.013 ccw(c72.948,30.121) 74.438,28.63 ccw(c75.929,27.14) P17.3@73.821,27.14 ; P8.2@76.64,38.32 cw(c75.046,38.32) 76.173,37.193 cw(c77.3,36.065) P8.2@77.3,37.66 ; P8.2@76.894,38.32 cw(c75.913,38.32) 76.607,37.626 cw(c77.3,36.932) P8.2@77.3,37.914
NetP8_3: P8.3 P17.1 | length 21.6
  TopLayer w0.254: P17.1@72.331,30.297 ccw(c70.84,31.788) 72.948,31.788 ccw(c75.056,31.788) P17.1@73.565,30.297 ; P17.1@72.51,30.118 ccw(c71.454,31.174) 72.948,31.174 ccw(c74.442,31.174) P17.1@73.386,30.118 ; P17.1 72.948,33.338 73.49,33.88 73.49,39.59 P8.3 ; P8.3@74.1,40.86 cw(c72.506,40.86) 73.633,39.733 cw(c74.76,38.605) P8.3@74.76,40.2 ; P8.3@74.354,40.86 cw(c73.373,40.86) 74.067,40.166 cw(c74.76,39.472) P8.3@74.76,40.454
NetP8_4: P8.4 P17.4 | length 27.9
  BottomLayer w0.254: P8.4 76.04,39.6 78.92,39.6 79.79,38.73 79.79,28.902 P17.4 ; P8.4@74.76,38.726 ccw(c74.76,39.708) 75.454,39.014 ccw(c76.148,38.32) P8.4@75.167,38.32 ; P8.4@74.76,38.98 ccw(c74.76,40.575) 75.888,39.447 ccw(c77.015,38.32) P8.4@75.421,38.32 ; P17.4@78.028,27.759 ccw(c78.028,29.253) 79.085,28.197 ccw(c80.141,27.14) P17.4@78.647,27.14 ; P17.4@78.028,28.013 ccw(c78.028,30.121) 79.518,28.63 ccw(c81.009,27.14) P17.4@78.901,27.14
NetP9_2: P9.2 P18.3 | length 22.7
  BottomLayer w0.254: P18.3 84.49,28.921 84.49,35.749 P9.2 ; P18.3@82.709,27.759 ccw(c82.709,29.253) 83.766,28.197 ccw(c84.822,27.14) P18.3@83.328,27.14 ; P18.3@82.709,28.013 ccw(c82.709,30.121) 84.199,28.63 ccw(c85.69,27.14) P18.3@83.582,27.14 ; P9.2@86.401,38.32 cw(c84.807,38.32) 85.934,37.193 cw(c87.061,36.065) P9.2@87.061,37.66 ; P9.2@86.655,38.32 cw(c85.674,38.32) 86.368,37.626 cw(c87.061,36.932) P9.2@87.061,37.914
NetP9_3: P9.3 P18.1 | length 21.6
  TopLayer w0.254: P18.1@82.092,30.297 ccw(c80.601,31.788) 82.709,31.788 ccw(c84.817,31.788) P18.1@83.326,30.297 ; P18.1@82.271,30.118 ccw(c81.215,31.174) 82.709,31.174 ccw(c84.203,31.174) P18.1@83.147,30.118 ; P18.1 82.709,32.439 83.25,32.98 83.25,39.589 P9.3 ; P9.3@83.861,40.86 cw(c82.267,40.86) 83.394,39.733 cw(c84.521,38.605) P9.3@84.521,40.2 ; P9.3@84.115,40.86 cw(c83.134,40.86) 83.828,40.166 cw(c84.521,39.472) P9.3@84.521,40.454
NetP9_4: P9.4 P18.4 | length 27.7
  BottomLayer w0.254: P9.4 85.801,39.6 88.34,39.6 89.54,38.4 89.54,28.891 P18.4 ; P9.4@84.521,38.726 ccw(c84.521,39.708) 85.215,39.014 ccw(c85.909,38.32) P9.4@84.928,38.32 ; P9.4@84.521,38.98 ccw(c84.521,40.575) 85.649,39.447 ccw(c86.776,38.32) P9.4@85.182,38.32 ; P18.4@87.789,27.759 ccw(c87.789,29.253) 88.846,28.197 ccw(c89.902,27.14) P18.4@88.408,27.14 ; P18.4@87.789,28.013 ccw(c87.789,30.121) 89.279,28.63 ccw(c90.77,27.14) P18.4@88.662,27.14
NetP10_2: P10.2 P19.3 | length 22.7
  BottomLayer w0.254: P19.3 94.32,28.99 94.32,35.818 P10.2 ; P19.3@92.47,27.759 ccw(c92.47,29.253) 93.527,28.197 ccw(c94.583,27.14) P19.3@93.089,27.14 ; P19.3@92.47,28.013 ccw(c92.47,30.121) 93.96,28.63 ccw(c95.451,27.14) P19.3@93.343,27.14 ; P10.2@96.162,38.32 cw(c94.568,38.32) 95.695,37.193 cw(c96.822,36.065) P10.2@96.822,37.66 ; P10.2@96.416,38.32 cw(c95.435,38.32) 96.129,37.626 cw(c96.822,36.932) P10.2@96.822,37.914
NetP10_3: P10.3 P19.1 | length 21.6
  TopLayer w0.254: P19.1@91.853,30.297 ccw(c90.362,31.788) 92.47,31.788 ccw(c94.578,31.788) P19.1@93.087,30.297 ; P19.1@92.032,30.118 ccw(c90.976,31.174) 92.47,31.174 ccw(c93.964,31.174) P19.1@92.908,30.118 ; P19.1 92.47,32.64 93.165,33.335 93.165,39.742 ; P10.3@93.622,40.856 cw(c92.061,40.846) 93.165,39.742 ; P10.3@93.876,40.857 cw(c92.915,40.852) 93.595,40.172 cw(c94.274,39.493) P10.3@94.28,40.454 ; P10.3@94.278,40.2 ccw(c94.269,38.639) 93.165,39.742 ; P10.3 93.165,39.742
NetP10_4: P10.4 P19.4 | length 28.1
  BottomLayer w0.254: P10.4 95.602,39.64 98.58,39.64 99.28,38.94 99.28,28.87 P19.4 ; P10.4@94.282,38.726 ccw(c94.282,39.708) 94.976,39.014 ccw(c95.67,38.32) P10.4@94.689,38.32 ; P10.4@94.282,38.98 ccw(c94.282,40.575) 95.41,39.447 ccw(c96.537,38.32) P10.4@94.943,38.32 ; P19.4@97.55,27.759 ccw(c97.55,29.253) 98.607,28.197 ccw(c99.663,27.14) P19.4@98.169,27.14 ; P19.4@97.55,28.013 ccw(c97.55,30.121) 99.04,28.63 ccw(c100.531,27.14) P19.4@98.423,27.14
PWR_MASTER: P11.6 P21.1 P21.2 R2.1 | length 28.8
  TopLayer w0.254: P21.2 19.84,15.262 19.84,10.4 R2.1 ; P21.2@18.382,16.197 cw(c18.382,14.934) 19.275,15.827 ; R2.1@18.67,9.484 ccw(c18.67,10.097) 19.104,9.664 ccw(c19.537,9.23) R2.1@18.924,9.23 ; P21.2@18.751,16.82 ccw(c19.883,16.82) 19.083,16.019 ; P21.2@19.005,16.82 ccw(c20.75,16.82) 19.516,15.586
  BottomLayer w1: P21.1 P21.2 19.462,18 P11.6 ; P21.2@18.632,16.82 cw(c19.477,16.82) 18.879,17.417 ; P11.6@19.108,24.246 cw(c18.255,23.393) 19.462,23.393 cw(c20.669,23.393) P11.6@19.816,24.246
PWR_SLOT1: P12.6 P22.1 P22.2 R4.1 | length 28.8
  TopLayer w0.254: P22.2 29.65,15.213 29.65,10.45 R4.1 ; P22.2@28.143,16.197 cw(c28.143,14.934) 29.036,15.827 ; R4.1@28.43,9.484 ccw(c28.43,10.097) 28.864,9.664 ccw(c29.297,9.23) R4.1@28.684,9.23 ; P22.2@28.512,16.82 ccw(c29.644,16.82) 28.844,16.019 ; P22.2@28.766,16.82 ccw(c30.511,16.82) 29.277,15.586
  BottomLayer w1: P22.1 P22.2 29.223,18 P12.6 ; P22.2@28.393,16.82 cw(c29.238,16.82) 28.64,17.417 ; P12.6@28.869,24.246 cw(c28.016,23.393) 29.223,23.393 cw(c30.43,23.393) P12.6@29.577,24.246
PWR_SLOT2: P13.6 P23.1 P23.2 R6.1 | length 28.7
  TopLayer w0.254: P23.2 39.34,15.284 39.34,10.32 R6.1 ; P23.2@37.904,16.197 cw(c37.904,14.934) 38.797,15.827 ; R6.1@38.25,9.484 ccw(c38.25,10.097) 38.684,9.664 ccw(c39.117,9.23) R6.1@38.504,9.23 ; P23.2@38.273,16.82 ccw(c39.405,16.82) 38.605,16.019 ; P23.2@38.527,16.82 ccw(c40.272,16.82) 39.038,15.586
  BottomLayer w1: P23.1 P23.2 38.984,18 P13.6 ; P23.2@38.154,16.82 cw(c38.999,16.82) 38.401,17.417 ; P13.6@38.63,24.246 cw(c37.777,23.393) 38.984,23.393 cw(c40.191,23.393) P13.6@39.338,24.246
PWR_SLOT3: P14.6 P24.1 P24.2 R8.1 | length 28.8
  TopLayer w0.254: P24.2 49.17,15.215 49.17,10.37 48.03,9.23 R8.1 ; P24.2@47.665,16.197 cw(c47.665,14.934) 48.558,15.827 ; R8.1@48.02,9.484 ccw(c48.02,10.121) 48.471,9.671 ; P24.2@48.034,16.82 ccw(c49.166,16.82) 48.366,16.019 ; R8.1@48.274,9.23 cw(c48.863,9.23) 48.447,9.647 ; P24.2@48.288,16.82 ccw(c50.033,16.82) 48.799,15.586
  BottomLayer w1: P24.1 P24.2 48.745,18 P14.6 ; P24.2@47.915,16.82 cw(c48.76,16.82) 48.162,17.417 ; P14.6@48.391,24.246 cw(c47.538,23.393) 48.745,23.393 cw(c49.952,23.393) P14.6@49.099,24.246
PWR_SLOT4: P15.6 P25.1 P25.2 R10.1 | length 28.7
  TopLayer w0.254: P25.2 58.86,15.286 58.86,10.19 R10.1 ; P25.2@57.426,16.197 cw(c57.426,14.934) 58.319,15.827 ; P25.2@57.795,16.82 ccw(c58.927,16.82) 58.127,16.019 ; R10.1@57.9,9.484 ccw(c57.9,10.097) 58.334,9.664 ccw(c58.767,9.23) R10.1@58.154,9.23 ; P25.2@58.049,16.82 ccw(c59.794,16.82) 58.56,15.586
  BottomLayer w1: P25.1 P25.2 58.506,18 P15.6 ; P25.2@57.676,16.82 cw(c58.521,16.82) 57.923,17.417 ; P15.6@58.152,24.246 cw(c57.299,23.393) 58.506,23.393 cw(c59.713,23.393) P15.6@58.86,24.246
PWR_SLOT5: P16.6 P26.1 P26.2 R12.1 | length 28.7
  TopLayer w0.254: P26.2 68.59,15.317 68.59,10.3 R12.1 ; P26.2@67.187,16.197 cw(c67.187,14.934) 68.08,15.827 ; R12.1@67.52,9.484 ccw(c67.52,10.097) 67.954,9.664 ccw(c68.387,9.23) R12.1@67.774,9.23 ; P26.2@67.556,16.82 ccw(c68.688,16.82) 67.888,16.019 ; P26.2@67.81,16.82 ccw(c69.555,16.82) 68.321,15.586
  BottomLayer w1: P26.1 P26.2 68.267,18 P16.6 ; P26.2@67.437,16.82 cw(c68.282,16.82) 67.684,17.417 ; P16.6@67.913,24.246 cw(c67.06,23.393) 68.267,23.393 cw(c69.474,23.393) P16.6@68.621,24.246
PWR_SLOT6: P17.6 P27.1 P27.2 R14.1 | length 28.8
  TopLayer w0.254: P27.2 78.42,15.248 78.42,10.44 R14.1 ; P27.2@76.948,16.197 cw(c76.948,14.934) 77.841,15.827 ; R14.1@77.21,9.484 ccw(c77.21,10.097) 77.644,9.664 ccw(c78.077,9.23) R14.1@77.464,9.23 ; P27.2@77.317,16.82 ccw(c78.449,16.82) 77.649,16.019 ; P27.2@77.571,16.82 ccw(c79.316,16.82) 78.082,15.586
  BottomLayer w1: P27.1 P27.2 78.028,18 P17.6 ; P27.2@77.198,16.82 cw(c78.043,16.82) 77.445,17.417 ; P17.6@77.674,24.246 cw(c76.821,23.393) 78.028,23.393 cw(c79.235,23.393) P17.6@78.382,24.246
PWR_SLOT7: P18.6 P28.1 P28.2 R16.1 | length 28.8
  TopLayer w0.254: P28.2 88.24,15.189 88.24,10.47 R16.1 ; P28.2@86.709,16.197 cw(c86.709,14.934) 87.602,15.827 ; R16.1@87,9.484 ccw(c87,10.097) 87.434,9.664 ccw(c87.867,9.23) R16.1@87.254,9.23 ; P28.2@87.078,16.82 ccw(c88.21,16.82) 87.41,16.019 ; P28.2@87.332,16.82 ccw(c89.077,16.82) 87.843,15.586
  BottomLayer w1: P28.1 P28.2 87.789,18 P18.6 ; P28.2@86.959,16.82 cw(c87.804,16.82) 87.206,17.417 ; P18.6@87.435,24.246 cw(c86.582,23.393) 87.789,23.393 cw(c88.996,23.393) P18.6@88.143,24.246
PWR_SLOT8: P19.6 P29.1 P29.2 R18.1 | length 28.8
  TopLayer w0.254: P29.2 97.92,15.27 97.92,10.43 R18.1 ; P29.2@96.47,16.197 cw(c96.47,14.934) 97.363,15.827 ; R18.1@96.72,9.484 ccw(c96.72,10.097) 97.154,9.664 ccw(c97.587,9.23) R18.1@96.974,9.23 ; P29.2@96.839,16.82 ccw(c97.971,16.82) 97.171,16.019 ; P29.2@97.093,16.82 ccw(c98.838,16.82) 97.604,15.586
  BottomLayer w1: P29.1 P29.2 97.55,18 P19.6 ; P29.2@96.72,16.82 cw(c97.565,16.82) 96.967,17.417 ; P19.6@97.196,24.246 cw(c96.343,23.393) 97.55,23.393 cw(c98.757,23.393) P19.6@97.904,24.246
TEST_M1: P2.1 P11.5 R1.1 | length 48.6
  TopLayer w0.254: P11.5@14.382,25.219 ccw(c14.382,26.713) 15.439,25.657 ccw(c16.495,24.6) P11.5@15.001,24.6 ; P11.5@14.382,25.473 ccw(c14.382,27.581) 15.872,26.09 ccw(c17.363,24.6) P11.5@15.255,24.6 ; P11.5@14.48,23.989 cw(c14.619,23.124) 15.238,23.743 cw(c15.858,24.363) P11.5@14.993,24.502 ; P11.5@14.521,23.738 cw(c14.717,22.519) 15.59,23.392 ; P11.5@15.244,24.461 ccw(c16.463,24.265) 15.59,23.392 ; R1.1@15.41,9.41 ccw(c14.977,9.843) 15.59,9.843 ccw(c16.203,9.843) R1.1@15.77,9.41 ; R1.1 15.59,23.392 ; P2.1@18.074,40.86 cw(c16.48,40.86) 17.607,39.733 cw(c18.734,38.605) P2.1@18.734,40.2 ; P2.1@18.328,40.86 cw(c17.347,40.86) 18.041,40.166 cw(c18.734,39.472) P2.1@18.734,40.454 ; P2.1 17.55,39.676 17.55,27.768 P11.5 15.59,23.392
TEST_S1: P3.1 P12.5 R3.1 | length 49.1
  TopLayer w0.254: P12.5@24.143,25.219 ccw(c24.143,26.713) 25.2,25.657 ccw(c26.256,24.6) P12.5@24.762,24.6 ; P12.5@24.143,25.473 ccw(c24.143,27.581) 25.633,26.09 ccw(c27.124,24.6) P12.5@25.016,24.6 ; P12.5@24.208,23.984 cw(c24.318,22.94) 25.06,23.683 cw(c25.803,24.425) P12.5@24.759,24.535 ; P12.5@24.234,23.732 cw(c24.39,22.259) 25.437,23.306 ; P12.5@25.011,24.508 ccw(c26.483,24.353) 25.437,23.306 ; R3.1@25.257,9.41 ccw(c24.823,9.843) 25.437,9.843 ccw(c26.05,9.843) R3.1@25.616,9.41 ; R3.1 25.437,23.306 ; P3.1@27.835,40.86 cw(c26.241,40.86) 27.368,39.733 cw(c28.495,38.605) P3.1@28.495,40.2 ; P3.1@28.089,40.86 cw(c27.108,40.86) 27.802,40.166 cw(c28.495,39.472) P3.1@28.495,40.454 ; P3.1 27.27,39.635 27.27,27.727 P12.5 25.437,23.306
TEST_S2: P4.1 P13.5 R5.1 | length 49.3
  TopLayer w0.254: P13.5@33.904,25.219 ccw(c33.904,26.713) 34.961,25.657 ccw(c36.017,24.6) P13.5@34.523,24.6 ; P13.5@33.904,25.473 ccw(c33.904,27.581) 35.394,26.09 ccw(c36.885,24.6) P13.5@34.777,24.6 ; P13.5@33.96,23.984 cw(c34.059,22.884) 34.839,23.665 cw(c35.62,24.445) P13.5@34.52,24.544 ; P13.5@33.982,23.731 cw(c34.122,22.18) 35.223,23.281 ; P13.5@34.773,24.522 ccw(c36.324,24.382) 35.223,23.281 ; R5.1@35.044,9.41 ccw(c34.61,9.843) 35.223,9.843 ccw(c35.837,9.843) R5.1@35.403,9.41 ; R5.1 35.223,23.281 ; P4.1@37.596,40.86 cw(c36.002,40.86) 37.129,39.733 cw(c38.256,38.605) P4.1@38.256,40.2 ; P4.1@37.85,40.86 cw(c36.869,40.86) 37.563,40.166 cw(c38.256,39.472) P4.1@38.256,40.454 ; P4.1 37,39.604 37,27.696 P13.5 35.223,23.281
TEST_S3: P5.1 P14.5 R7.1 | length 49.5
  TopLayer w0.254: P14.5@43.665,25.219 ccw(c43.665,26.713) 44.722,25.657 ccw(c45.778,24.6) P14.5@44.284,24.6 ; P14.5@43.665,25.473 ccw(c43.665,27.581) 45.155,26.09 ccw(c46.646,24.6) P14.5@44.538,24.6 ; P14.5@43.71,23.983 cw(c43.796,22.819) 44.621,23.644 cw(c45.446,24.469) P14.5@44.282,24.555 ; P14.5@43.729,23.729 cw(c43.849,22.088) 45.013,23.252 ; P14.5@44.536,24.536 ccw(c46.177,24.416) 45.013,23.252 ; R7.1@44.834,9.41 ccw(c44.4,9.843) 45.013,9.843 ccw(c45.627,9.843) R7.1@45.193,9.41 ; R7.1 45.013,23.252 ; P5.1@47.357,40.86 cw(c45.763,40.86) 46.89,39.733 cw(c48.017,38.605) P5.1@48.017,40.2 ; P5.1@47.611,40.86 cw(c46.63,40.86) 47.324,40.166 cw(c48.017,39.472) P5.1@48.017,40.454 ; P5.1 46.74,39.583 46.74,27.675 P14.5 45.013,23.252
TEST_S4: P6.1 P15.5 R9.1 | length 50
  TopLayer w0.254: P15.5@53.426,25.219 ccw(c53.426,26.713) 54.483,25.657 ccw(c55.539,24.6) P15.5@54.045,24.6 ; P15.5@53.426,25.473 ccw(c53.426,27.581) 54.916,26.09 ccw(c56.407,24.6) P15.5@54.299,24.6 ; P15.5@53.445,23.981 cw(c53.487,22.637) 54.438,23.588 cw(c55.389,24.539) P15.5@54.045,24.581 ; P15.5@53.453,23.727 cw(c53.512,21.831) 54.853,23.173 ; P15.5@54.299,24.573 ccw(c56.195,24.514) 54.853,23.173 ; R9.1@54.674,9.41 ccw(c54.24,9.843) 54.853,9.843 ccw(c55.467,9.843) R9.1@55.033,9.41 ; R9.1 54.853,23.173 ; P6.1@57.118,40.86 cw(c55.524,40.86) 56.651,39.733 cw(c57.778,38.605) P6.1@57.778,40.2 ; P6.1@57.372,40.86 cw(c56.391,40.86) 57.085,40.166 cw(c57.778,39.472) P6.1@57.778,40.454 ; P6.1 56.6,39.682 56.6,27.774 P15.5 54.853,23.173
TEST_S5: P7.1 P16.5 R11.1 | length 49.3
  TopLayer w0.254: P16.5@63.187,25.219 ccw(c63.187,26.713) 64.244,25.657 ccw(c65.3,24.6) P16.5@63.806,24.6 ; P16.5@63.187,25.473 ccw(c63.187,27.581) 64.677,26.09 ccw(c66.168,24.6) P16.5@64.06,24.6 ; P16.5@63.24,23.983 cw(c63.336,22.868) 64.127,23.66 cw(c64.919,24.451) P16.5@63.804,24.547 ; P16.5@63.262,23.73 cw(c63.397,22.158) 64.513,23.274 ; P16.5@64.057,24.525 ccw(c65.629,24.39) 64.513,23.274 ; R11.1@64.334,9.41 ccw(c63.9,9.843) 64.513,9.843 ccw(c65.127,9.843) R11.1@64.693,9.41 ; R11.1 64.513,23.274 ; P7.1@66.879,40.86 cw(c65.285,40.86) 66.412,39.733 cw(c67.539,38.605) P7.1@67.539,40.2 ; P7.1@67.133,40.86 cw(c66.152,40.86) 66.846,40.166 cw(c67.539,39.472) P7.1@67.539,40.454 ; P7.1 66.31,39.631 66.31,27.723 P16.5 64.513,23.274
TEST_S6: P8.1 P17.5 R13.1 | length 48.9
  TopLayer w0.254: P17.5@72.948,25.219 ccw(c72.948,26.713) 74.005,25.657 ccw(c75.061,24.6) P17.5@73.567,24.6 ; P17.5@72.948,25.473 ccw(c72.948,27.581) 74.438,26.09 ccw(c75.929,24.6) P17.5@73.821,24.6 ; P17.5@73.03,23.986 cw(c73.157,23.038) 73.833,23.715 cw(c74.51,24.391) P17.5@73.562,24.518 ; P17.5@73.064,23.735 cw(c73.242,22.397) 74.197,23.351 ; P17.5@73.813,24.484 ccw(c75.151,24.306) 74.197,23.351 ; R13.1@74.017,9.41 ccw(c73.583,9.843) 74.197,9.843 ccw(c74.81,9.843) R13.1@74.376,9.41 ; R13.1 74.197,23.351 ; P8.1@76.64,40.86 cw(c75.046,40.86) 76.173,39.733 cw(c77.3,38.605) P8.1@77.3,40.2 ; P8.1@76.894,40.86 cw(c75.913,40.86) 76.607,40.166 cw(c77.3,39.472) P8.1@77.3,40.454 ; P8.1 75.99,39.55 75.99,27.642 P17.5 74.197,23.351
TEST_S7: P9.1 P18.5 R15.1 | length 48.6
  TopLayer w0.254: P18.5@82.709,25.219 ccw(c82.709,26.713) 83.766,25.657 ccw(c84.822,24.6) P18.5@83.328,24.6 ; P18.5@82.709,25.473 ccw(c82.709,27.581) 84.199,26.09 ccw(c85.69,24.6) P18.5@83.582,24.6 ; P18.5@82.809,23.989 cw(c82.949,23.132) 83.563,23.746 cw(c84.177,24.36) P18.5@83.32,24.5 ; P18.5@82.85,23.738 cw(c83.047,22.53) 83.913,23.396 cw(c84.779,24.262) P18.5@83.571,24.459 ; R15.1@83.734,9.41 ccw(c83.3,9.843) 83.913,9.843 ccw(c84.527,9.843) R15.1@84.093,9.41 ; R15.1 83.913,23.396 P18.5 85.85,27.741 85.85,39.649 P9.1 ; P9.1@86.401,40.86 cw(c84.807,40.86) 85.934,39.733 cw(c87.061,38.605) P9.1@87.061,40.2 ; P9.1@86.655,40.86 cw(c85.674,40.86) 86.368,40.166 cw(c87.061,39.472) P9.1@87.061,40.454
TEST_S8: P10.1 P19.5 R17.1 | length 50.3
  TopLayer w0.254: P19.5@91.853,23.983 cw(c90.362,22.492) 92.47,22.492 cw(c94.578,22.492) P19.5@93.087,23.983 ; P19.5@92.032,24.162 cw(c90.976,23.106) 92.47,23.106 cw(c93.964,23.106) P19.5@92.908,24.162 ; P19.5@92.47,25.219 ccw(c92.47,26.713) 93.527,25.657 ccw(c94.583,24.6) P19.5@93.089,24.6 ; P19.5@92.47,25.473 ccw(c92.47,27.581) 93.96,26.09 ccw(c95.451,24.6) P19.5@93.343,24.6 ; R17.1@93.487,9.41 ccw(c93.053,9.843) 93.667,9.843 ccw(c94.28,9.843) R17.1@93.846,9.41 ; R17.1 93.667,18.673 92.47,19.87 P19.5 95.56,27.69 95.56,39.598 P10.1 ; P10.1@96.162,40.86 cw(c94.568,40.86) 95.695,39.733 cw(c96.822,38.605) P10.1@96.822,40.2 ; P10.1@96.416,40.86 cw(c95.435,40.86) 96.129,40.166 cw(c96.822,39.472) P10.1@96.822,40.454
USB_PWR: P1.2 P20.3 P20.4 | length 14.9
  BottomLayer w1: P1.2 1.42,19.96 1.42,15.23 1.83,14.82 P20.3 P20.4
pads on no net: J1. J1.2 J1.3 J1.4b P20.5 P20.6 P21.5 P21.6 P22.5 P22.6 P23.5 P23.6 P24.5 P24.6 P25.5 P25.6 P26.5 P26.6 P27.5 P27.6 P28.5 P28.6 P29.5 P29.6

## Polygon pours and split planes (outlines as drawn)
DGND on TopLayer "TopLayer-No Net" (solid, remove dead copper): 0,0 0,50 110,50 110,0
DGND on BottomLayer "TopLayer-No Net" (solid, remove dead copper): 110,50 0,50 0,0 110,0

## Keep-outs
KeepOutLayer:
  the board outline again, w0.2

## Silkscreen, mask and mechanical layers (free items; w line width, h text height)
TopOverlay:
  text "HV1.0.0" at 21.43,46.01 h2
  text "IQIYI" at 12.99,45.92 h3
  text "Master" at 13.65,4.47 h2
  text "SLOT1" at 23.71,4.18 h2
  text "SLOT2" at 33.58,4.18 h2
  text "SLOT3" at 43.06,4.18 h2
  text "SLOT4" at 52.63,4.18 h2
  text "SLOT5" at 62.49,4.18 h2
  text "SLOT6" at 71.68,4.18 h2
  text "SLOT7" at 81.74,4.18 h2
  text "SLOT8" at 91.31,4.18 h2
BottomOverlay:
  text "2.4G HV1.0.0" at 27.59,4.14 h3
  text "yaojun@qiyi.com" at 26.29,1.84 h2